# Altium PCB DRV8462.PcbDoc
Units mil, origin at the board's own origin, x right, y up, seen from the top; angles counter-clockwise.
Board outline 2020 x 1320 mil, 2 copper layers (Top Layer, Bottom Layer); 19 components, 21 nets, 87 pads, 96 vias.
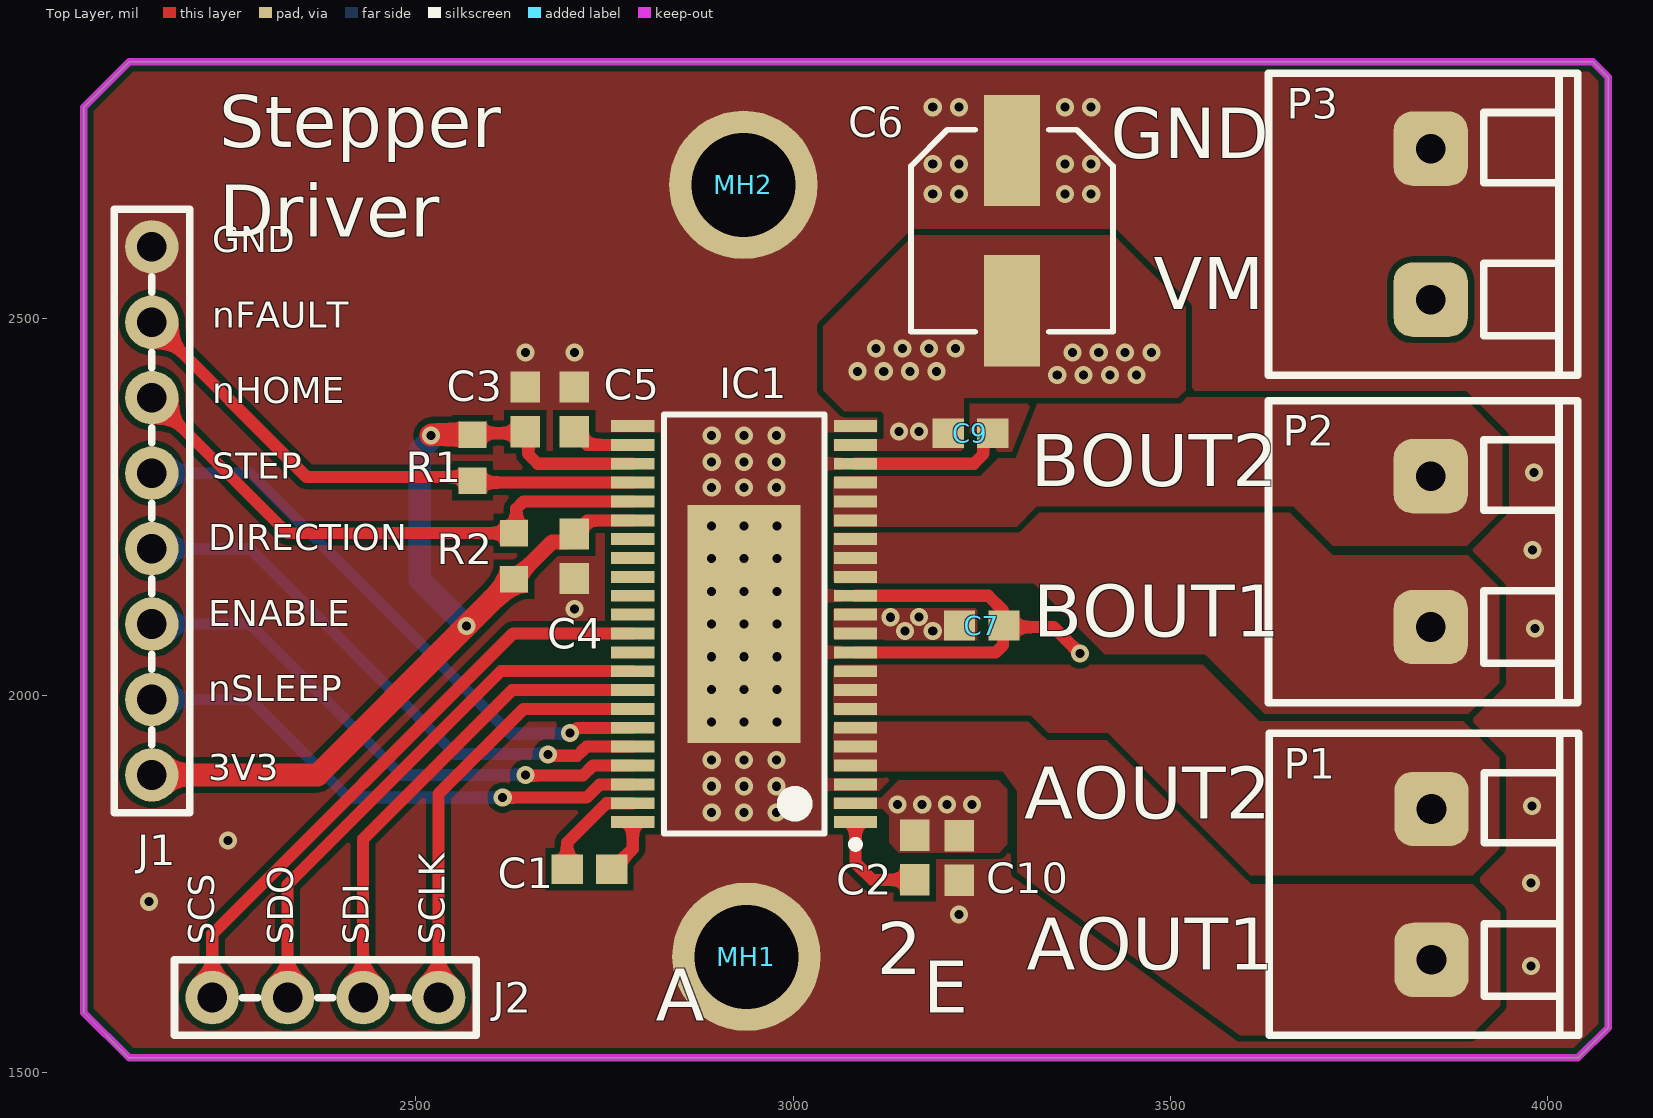
[diagram p0: Top Layer view]
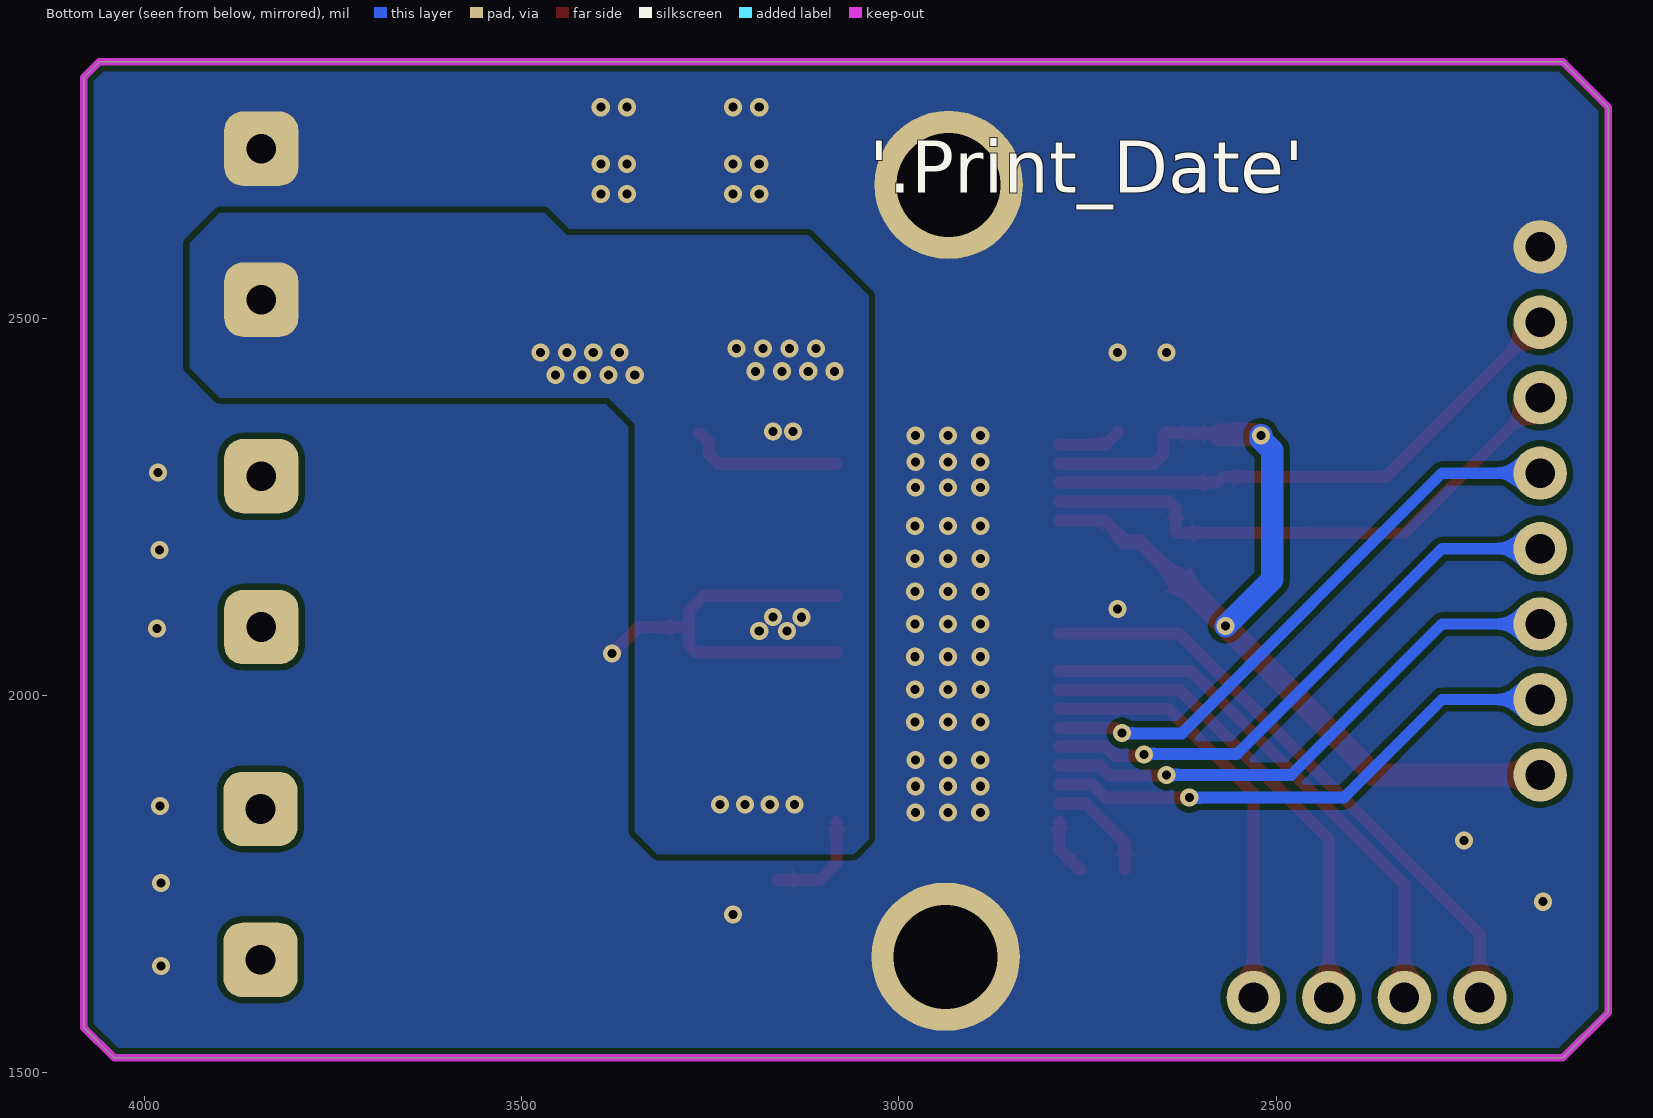
[diagram p1: Bottom Layer view, seen from below]
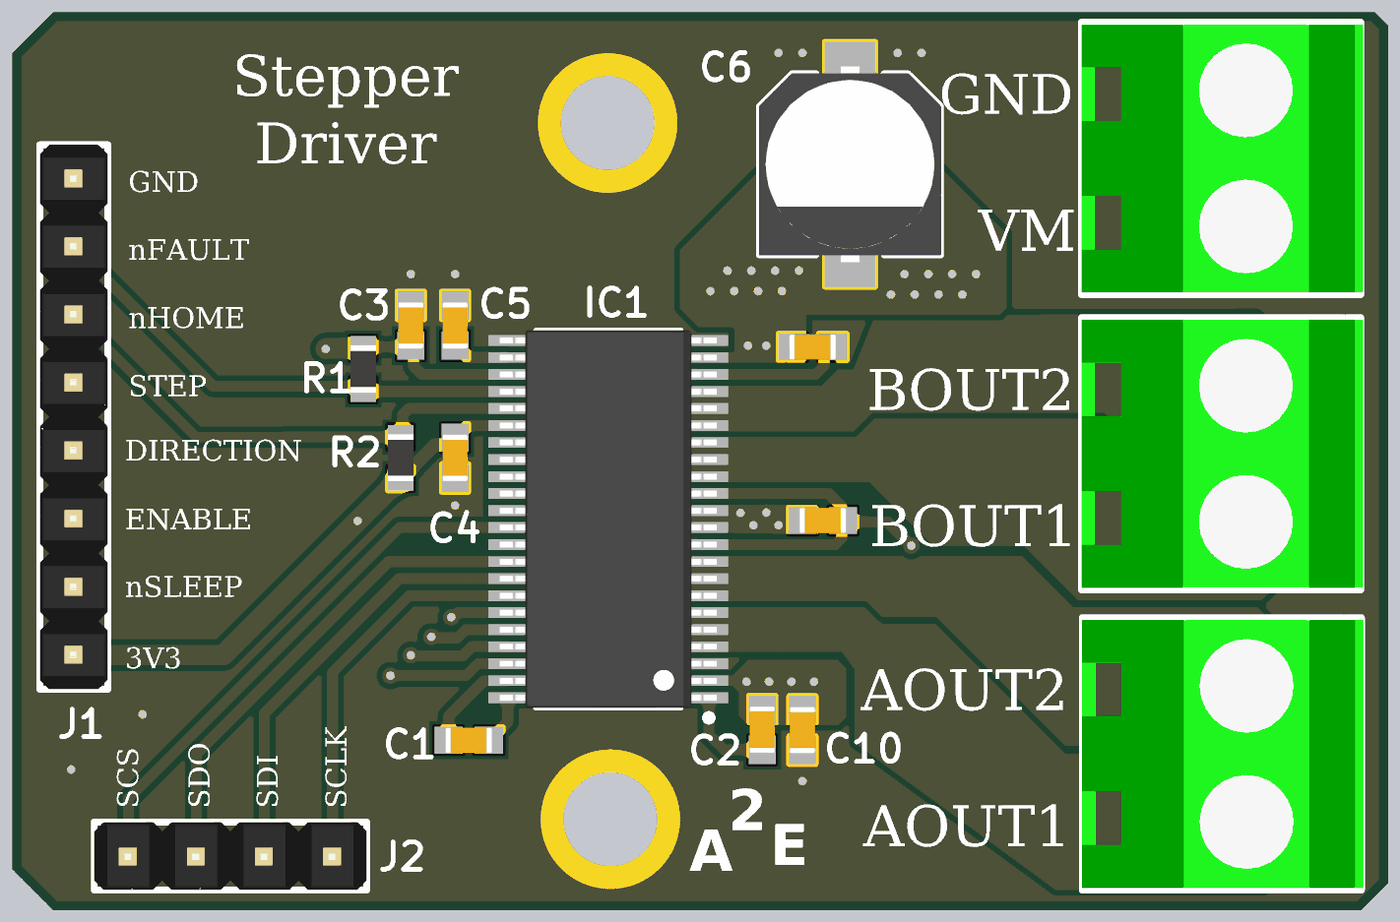
[diagram p2: 3D render of the assembled board from above, using the file's embedded part models]

## Layer stack, top to bottom
Top Solder: solder mask 0.4, Solder Resist, Dk 3.5
Top Layer: signal copper 1.4
Dielectric 1: dielectric 12.6, FR-4, Dk 4.8
Bottom Layer: signal copper 1.4
Bottom Solder: solder mask 0.4, Solder Resist, Dk 3.5

## Board outline
2060,1580 2120,1520 4040,1520 4080,1560 4080,2820 4060,2840 2120,2840 2060,2780

## Design rules (kind name [scope] priority, off if disabled: settings)
Clearance [All] p1: gap=8 ignorepadtopadclearanceinfootprint=FALSE
PlaneConnect [InNet('GND')] p1: planeconnectstyle=Direct reliefexpansion=20 reliefentries=4 reliefconductorwidth=10 reliefairgap=10
PolygonConnect PolygonConnect_1 [InNetClass('All Nets')] p1: connectstyle=Direct reliefconductorwidth=10 reliefentries=4 polygonreliefangle="90 Angle" airgapwidth=10
PolygonConnect [All] p2: connectstyle=Relief reliefconductorwidth=10 reliefentries=4 polygonreliefangle="90 Angle" airgapwidth=10
RoutingVias RoutingVias_1 [InNet('GND')] p1: holewidth=7.87 width=19.68 viastyle="Through Hole" minholewidth=7.87 minwidth=19.68 maxholewidth=29.53 maxwidth=59.06
RoutingVias [All] p2: holewidth=12 width=24 viastyle="Through Hole" minholewidth=5 minwidth=18 maxholewidth=12 maxwidth=24
SolderMaskExpansion [All] p1: expansion=4 istentingtop=FALSE
Width Width_1 [InNet('VM')] p1: maxlimit=30 minlimit=15 preferedwidth=16
Width [InNetClass('Signals')] p2: maxlimit=30 minlimit=15 preferedwidth=16
29 further rules are at their usual default settings.

## Classes and differential pairs
component class clas1: C6 IC1 J1 P3
net class Signals: \F\A\U\L\T\ \H\O\M\E\ \S\C\S\ \S\L\E\E\P\ CPH CPL DIR DVDD ENABLE GND SCLK SDI SDO STEP VCC-3V3 VCP
net class HIGH_current: AOUT1 AOUT2 BOUT1 BOUT2 VM

## Components (designator, comment, footprint, x,y, rotation, side; value= is the part's Value field where it differs from the comment)
C1 "0.1uf" CAP_0603 2730,1770 r0 top
C2 "1uf" CAP_0603 3161,1785.53 r90 top
C3 "1uf" CAP_0603 2645,2379.53 r90 top
C4 "0.1uf" CAP_0603 2710,2185 r90 top
C5 "1uf" CAP_0603 2710,2379.53 r270 top
C6 "100uf" CAPAE7366X60M 3290,2616.3 r270 top
C7 "10000pf" CAP_0603 3250,2093 r180 top
C9 "10000pf" CAP_0603 3235,2348 r180 top
C10 "10000pf" CAP_0603 3220,1785 r90 top
IC1 "DRV8462 Bipolar stepper driver" TSOP64P810X120_HS-45N 2935,2095 r180 top
J1 "Header 8 PIN" HEADER_8PIN 2150,1895 r90 top
J2 "Header 4 PIN" HEADER_4PIN 2530,1600 r180 top
MH1 "Mounting Hole" HOLE-3mm 2938,1654 r0 top
MH2 "Mounting Hole" HOLE-3mm 2934,2677 r0 top
P1 "Terminal Block" "TERM_BLOCK 5mm 2PIN" 3846,1650 r90 top
P2 "Terminal Block" "TERM_BLOCK 5mm 2PIN" 3845,2091 r90 top
P3 "Terminal Block" "TERM_BLOCK 5mm 2PIN" 3845,2525 r90 top
R1 "10Kohm" RES_0603 2575,2315.51 r90 top
R2 "10Kohm" RES_0603 2630,2185 r270 top

## Footprints (in the part's own frame and the unit in brackets; to place one, negate y for a bottom-side part, rotate by r counter-clockwise, add the part's x,y. Pads: shape width x height; smd on the part's side, far side on the other; paste and mask are expansions set on the pad)
CAP_0603 [mm] "Chip Capacitor, 2-Leads, Body 1.60x0.80mm, IPC Medium Density"
  rect 1.05x1 smd: 1(-0.75,0) 2(0.75,0)
  body extent -0.87,-0.48 0.87,0.48, height 0.8
CAPAE7366X60M [mm] "Aluminum Electrolytic Capacitor, Body 6.60x6.60x6.00mm, IPC Low Density"
  rect 3.75x1.9 smd: 1(-2.7,0) 2(2.7,0)
  silkscreen extent -3.4,-3.4 3.4,3.4, body extent -3.65,-3.4 3.65,3.4, height 6
HEADER_4PIN [mm]
  round 1.8 hole 1: 1(0,0) 2(2.54,0) 3(5.08,0) 4(7.62,0)
  silkscreen extent -1.27,-1.27 8.89,1.27, body extent -1.27,-1.27 8.89,1.27, height 9.2
HEADER_8PIN [mm]
  round 1.8 hole 1: 1(0,0) 2(2.54,0) 3(5.08,0) 4(7.62,0) 5(10.16,0) 6(12.7,0) 7(15.24,0) 8(17.78,0)
  silkscreen extent -1.27,-1.27 19.05,1.27, body extent -1.27,-1.27 19.05,1.27, height 9.2
HOLE-3mm [mm]
  round 5 hole 3.5: 1(0,0)
RES_0603 [mm] "Chip Resistor, 2-Leads, Body 1.60x0.80mm, IPC Medium Density"
  rect 0.9x0.95 smd: 1(-0.775,0) 2(0.775,0)
  body extent -0.87,-0.48 0.87,0.48, height 0.8
"TERM_BLOCK 5mm 2PIN" [mm]
  rrect50% 2.5x2.5 hole 1: 1(0,0) 2(5.08,0)
  silkscreen extent -2.54,-4.95 7.62,5.46, body extent -2.46,-5.04 7.54,5.46, height 14
TSOP64P810X120_HS-45N [mm] "TSOP, 44-Leads, Body 14.00x6.10mm, Pitch 0.64mm, Thermal Pad 8.00x3.80mm, IPC Medium Density"
  rect 1.45x0.4 smd mask-0.025: 1(-3.75,6.667) 2(-3.75,6.032) 3(-3.75,5.397) 4(-3.75,4.762) 5(-3.75,4.127) 6(-3.75,3.492) 7(-3.75,2.857) 8(-3.75,2.222) 9(-3.75,1.587) 10(-3.75,0.952) 11(-3.75,0.317) 12(-3.75,-0.318) 13(-3.75,-0.953) 14(-3.75,-1.588) 15(-3.75,-2.223) 16(-3.75,-2.858) 17(-3.75,-3.493) 18(-3.75,-4.128) 19(-3.75,-4.763) 20(-3.75,-5.398) 21(-3.75,-6.033) 22(-3.75,-6.667) 23(3.75,-6.667) 24(3.75,-6.032) 25(3.75,-5.397) 26(3.75,-4.762) 27(3.75,-4.127) 28(3.75,-3.492) 29(3.75,-2.857) 30(3.75,-2.222) 31(3.75,-1.587) 32(3.75,-0.952) 33(3.75,-0.317) 34(3.75,0.318) 35(3.75,0.953) 36(3.75,1.588) 37(3.75,2.223) 38(3.75,2.858) 39(3.75,3.493) 40(3.75,4.128) 41(3.75,4.763) 42(3.75,5.398) 43(3.75,6.033) 44(3.75,6.667)
  rect 3.8x8 smd mask-0.025: 45(0,0)
  silkscreen extent -3.88,-7.05 2.7,7.54, body extent -4.05,-7.05 4.05,7.05, height 1.2

## Part data
C1 C4: library part 0000012, "CAP CER 0.1uF 10V X7R 0603", Digikey part number=732-7939-2-ND, capaticanse=0.1uf, ComponentLink1Description=digikey, ComponentLink1URL=https://www.digikey.com/en/products/detail/w%C3%BCrth-elektronik/885012206020/5453794
C2 C5: library part 0000009, "CAP CER 1uF 0603 16V X7R", Digikey part number=1276-1019-2-ND, capaticanse=1uf, ComponentLink1Description=digikey, ComponentLink1URL=https://www.digikey.com/en/products/detail/samsung-electro-mechanics/CL10B105KO8NNNC/3886677
C3: library part 0000011, "CAP CER 1uF 10V X7R 0603", Digikey part number=1276-1946-2-ND, capaticanse=1uf, ComponentLink1Description=digikey, ComponentLink1URL=https://www.digikey.com/en/products/detail/samsung-electro-mechanics/CL10B105KP8NNNC/3887604
C6: library part 0000013, "CAP ALUM POLY 100UF 20% 63V SMD", Digikey part number=399-15648-2-ND, capaticanse=100uf, ComponentLink1Description=digikey, ComponentLink1URL=https://www.digikey.com/en/products/detail/kemet/A767MU107M1JLAE028/7392906
C7 C9 C10: library part 0000010, "CAP CER 10000PF 63V X7R 0603", Digikey part number=1608-1294-2-ND, capaticanse=10000pf, ComponentLink1Description=digikey, ComponentLink1URL=https://www.digikey.com/en/products/detail/knowles-syfer/060330630103KXT/6565244
IC1: library part DRV8462, "65-V, 10-A, DUAL H-BRIDGE STEPPER DRIVER", Digikey part number=296-DRV8462DDWRTR-ND, Mouser part number=595-DRV8462DDWR, ComponentLink1Description=DigiKey, ComponentLink1URL=https://www.digikey.com/en/products/detail/texas-instruments/DRV8462DDWR/17395001?s=N4IgTCBcDaICYCcBuAOALANggXQL5A, ComponentLink2Description=Mouser, ComponentLink2URL=https://eu.mouser.com/ProductDetail/Texas-Instruments/DRV8462DDWR?qs=rQFj71Wb1eVexvYNsDfnvA%3D%3D, ComponentLink3Description=datasheet, ComponentLink3URL=https://www.ti.com/lit/ds/symlink/drv8462.pdf
J1: library part 00000005
J2: library part 00000004
MH1 MH2: library part 00000006, "Mounting Hole 3mm"
P1 P2 P3: library part 00000001, "Terminal block 90 deg 5mm 2PIN", Digikey part number=2057-EB20-02-C-ND, ComponentLink1Description=DigiKey, ComponentLink1URL=https://www.digikey.com/en/products/detail/adam-tech/EB20-02-C/9831508
R1 R2: library part R000001, "RES 10K OHM 1% 1/10W 0603", ComponentLink1Description=digikey, ComponentLink1URL=https://www.digikey.com/en/products/detail/vishay-beyschlag-draloric-bc-components/MCT06030C1002FP500/1850440, resistance=10Kohm

## Via types
v1: diameter 24, hole 12, Top Layer to Bottom Layer, 96 vias

## Nets (pads, with @x,y where several pads share a name; then routed paths per layer and width w, separated by ;. In a path a pad name is that pad's centre, name@x,y a point inside that pad or via, vN(x,y) a via of type N, cw(c..) or ccw(c..) an arc to the next point about the centre after c; other vN are vias at no path point)
\F\A\U\L\T\: IC1.26 J1.7 R1.1 | length 725.4
  Top Layer w16: J1.7 2355,2290 2570,2290 R1.1 2577.37,2282.63 2787.24,2282.63 IC1.26
\H\O\M\E\: IC1.27 J1.6 R2.1 | length 746.4
  Top Layer w15: J1.6 2329.49,2215.51 2459.49,2215.51
  Top Layer w16: 2459.49,2215.51 R2.1 2633,2218.51 2633,2248 2642.5,2257.5 IC1.27
\S\C\S\: IC1.34 J2.4 | length 806.4
  Top Layer w16: J2.4 2230,1683.94 2628.56,2082.5 IC1.34
\S\L\E\E\P\: IC1.42 J1.2 | length 698.5
  Top Layer w16: v1(2615,1865) 2726.06,1865 2743.43,1882.37 2787.24,1882.37 IC1.42
  Bottom Layer w15: J1.2 2280,1995 2410,1865
  Bottom Layer w16: 2410,1865 v1(2615,1865)
AOUT1: IC1.4 IC1.5 IC1.6 P1.1
AOUT2: IC1.7 IC1.8 IC1.9 P1.2
BOUT1: IC1.14 IC1.15 IC1.16 P2.1
BOUT2: IC1.17 IC1.18 IC1.19 P2.2
CPH: C1.2 IC1.44 | length 74.6
  Top Layer w16: C1.2 2760.51,1770 2787.36,1796.85 IC1.44
CPL: C1.1 IC1.43 | length 143.9
  Top Layer w16: C1.1 2700.47,1805.47 2752.5,1857.5 IC1.43
DIR: IC1.40 J1.4 | length 756.1
  Top Layer w16: v1(2675,1922) 2676.53,1920.47 2713.65,1920.47 2722.68,1929.5 2722.78,1929.5 2725.78,1932.5 IC1.40
  Bottom Layer w15: J1.4 2280,2195 2552,1923
  Bottom Layer w16: 2552,1923 2674,1923 v1(2675,1922)
DVDD: C5.2 IC1.24 | length 85.2
  Top Layer w16: C5.2 2710,2349.02 2726.52,2332.5 IC1.24
ENABLE: IC1.41 J1.3 | length 726.2
  Top Layer w16: v1(2645,1895) 2646,1894 2721.12,1894 2734.62,1907.5 IC1.41
  Bottom Layer w15: J1.3 2280,2095 2480,1895
  Bottom Layer w16: 2480,1895 v1(2645,1895)
GND: C3.2 C4.1 C5.1 C6.1 C7.1 C9.1 C10.1 IC1.3 IC1.10 IC1.13 IC1.20 IC1.22 IC1.23 IC1.45 J1.8 MH1.1 MH2.1 P3.2 | length 774.3
  Top Layer w16: IC1.10 3175.38,2057.5 3175.57,2057.31 3268.31,2057.31 3278,2067 3278,2091.47 C7.1 ; IC1.13 3258.5,2132.5 3278,2113 3278,2094.53 C7.1 ; IC1.20 3239.5,2307.5 3251.86,2319.86 3251.86,2336.31 3263.54,2348 C9.1 ; v1(3380,2056) 3345,2091 3281.53,2091 C7.1
  other v1: 3978,1642 3220,1710 2146,1727 3978,1752 2251,1808 2892,1845 2935,1845 2978,1845 3979,1854 2892,1880 2935,1880 2978,1880 2892,1915 2935,1915 2978,1915 2891.69,1965.08 2935,1965.08 2978.31,1965.08 2891.69,2008.39 2935,2008.39 2978.31,2008.39 2891.69,2051.69 2935,2051.69 2978.31,2051.69 3983,2089 2891.69,2095 2935,2095 2978.31,2095 2710,2115 2891.69,2138.31 2935,2138.31 2978.31,2138.31 2891.69,2181.61 2935,2181.61 2978.31,2181.61 3980,2193 2891.69,2224.92 2935,2224.92 2978.31,2224.92 2892,2276 2935,2276 2978,2276 3982,2296 2892,2310 2935,2310 2978,2310 2892,2345 2935,2345 2978,2345 2645,2455 2710,2455 3185,2665 3220,2665 3360,2665 3395,2665 3185,2705 3220,2705 3360,2705 3395,2705 3185,2780 3220,2780 3360,2780 3395,2780
SCLK: IC1.38 J2.1 | length 574
  Top Layer w16: J2.1 2530,1870 2642.5,1982.5 IC1.38
SDI: IC1.37 J2.2 | length 649.2
  Top Layer w16: J2.2 2430,1810 2627.5,2007.5 IC1.37
SDO: IC1.36 J2.3 | length 724.4
  Top Layer w16: J2.3 2330,1750 2612.5,2032.5 IC1.36
STEP: IC1.39 J1.5 | length 783.4
  Top Layer w16: v1(2704.39,1950.71) 2706.56,1950.71 2713.35,1957.5 IC1.39
  Bottom Layer w15: J1.5 2280,2295 2625,1950
  Bottom Layer w16: 2625,1950 2703.69,1950 v1(2704.39,1950.71)
VCC-3V3: C3.1 C4.2 IC1.25 IC1.28 J1.1 R1.2 R2.2 | length 1365.1
  Top Layer w16: R1.2 2576.99,2348.01 2643.01,2348.01 C3.1 2649,2346 2649,2320 2661.5,2307.5 IC1.25 ; C4.2 2710,2215.51 2726.99,2232.5 IC1.28
  Top Layer w20: R2.2 2630.98,2154.49 2680.35,2203.86 2700.31,2203.86 2710,2213.54 C4.2
  Top Layer w30: J1.1 2369.53,1895 v1(2566.77,2092.24) 2629.02,2154.49 R2.2 ; v1(2520,2345) 2521.02,2346.02 R1.2
  Bottom Layer w30: v1(2520,2345) 2520,2340 2505,2325 2505,2154.02 v1(2566.77,2092.24)
VCP: C2.1 IC1.1 | length 141.8
  Top Layer w16: IC1.1 3082.64,1778.36 3105,1756 C2.1
VM: C2.2 C6.2 C7.2 C9.2 C10.2 IC1.2 IC1.11 IC1.12 IC1.21 P3.1
  other v1: 3138,1856 3171,1856 3204,1856 3237,1856 3148,2086 3185,2086 3129,2104 3167,2104.5 3140,2350 3167,2350 3350,2425 3385,2425 3420,2425 3455,2425 3085,2430 3120,2430 3155,2430 3190,2430 3370,2455 3405,2455 3440,2455 3475,2455 3110,2460 3145,2460 3180,2460 3215,2460
pads on no net: IC1.29 IC1.30 IC1.31 IC1.32 IC1.33 IC1.35

## Polygon pours and split planes (outlines as drawn)
GND on Top Layer "TOP-GND" (solid, remove dead copper, pour order 18): 2060,1580 2120,1520 4040,1520 4080,1560 4080,2820 4060,2840 2120,2840 2060,2780
AOUT1 on Top Layer "AOUT1_L01_P017" (solid, pour order 17): 3278,1900 3053,1900 3053,1965 3054,1966 3312,1966 3337,1941 3416,1941 3607,1750 3901,1750 3937,1714 3937,1589 3898,1550 3757,1550 3592,1550 3297,1766 3297,1873.4
AOUT2 on Top Layer "AOUT2_L01_P016" (solid, pour order 16): 3053,2039 3055,2041 3393,2041 3543,2041 3618,1966 3888,1966 3936,1918 3936,1797 3901,1762 3606,1762 3417,1951 3338,1951 3315,1974 3055,1974 3053,1976
BOUT1 on Top Layer "BOUT1_L01_P014" (solid, pour order 14): 3053,2149 3053,2216 3054,2217 3300,2217 3327,2244 3657,2244 3715,2186 3894,2186 3936,2144 3936,2017 3895,1976 3625,1976 3546,2055 3413,2055 3319,2149 3116,2149
VM on Top Layer "VM_L01_P015" (solid, pour order 15): 3053,2114 3055,2116 3241,2116 3244,2113 3244,2072 3123,2072 3120,2075 3055,2075 3053,2077
BOUT2 on Top Layer "BOUT2_L01_P011" (solid, pour order 11): 3053,2288 3056,2291 3248,2291 3272,2315 3295,2315 3327,2395 3887.98,2396.02 3940,2344 3940,2246 3893,2199 3715,2199 3663,2251 3323,2251 3296,2224 3053,2224 3053,2287
VM on Top Layer "VM_L01_P009" (solid, pour order 9): 3054,2339 3055,2340 3118,2340 3120,2342 3120,2373 3116,2377 3068,2377 3040,2405 3217,2405 3226,2396 3226,2328 3223,2325 3054,2325
VM on Top Layer "VM_L01_P008" (solid, pour order 8): 3053,1865 3117,1865 3140,1888 3272,1888 3284,1876 3284,1803 3273,1792 3140,1792 3127,1805 3127,1841 3118,1850 3053,1850
VM on Top Layer "VM_L01_P007" (solid, pour order 7): 3050,2395 3040,2405 3040,2490 3160,2610 3425,2610 3520,2515 3520,2405 3510,2395
GND on Bottom Layer "BOT-GND" (solid, pour order 19): 2060,1580 2120,1520 4040,1520 4080,1560 4080,2820 4060,2840 2120,2840 2060,2780
VM on Bottom Layer "VM_L02_P006" (solid, pour order 6): 3900,2395 3940,2435 3940,2600 3900,2640 3470,2640 3440,2610 3120,2610 3040,2530 3040,1810 3060,1790 3320,1790 3350,1820 3350,2360 3370,2380 3385,2395

## Keep-outs
Keep-Out Layer:
  the board outline again, w10

## Silkscreen, mask and mechanical layers (free items; w line width, h text height)
Top Overlay:
  text "GND" at 3420.59,2690.7 h114.17
  text "Stepper / Driver" at 2239.08,2586 h118.11
  text "GND" at 2230,2575.78 h60
  text "VM" at 3477.82,2489.42 h118.11
  text "nFAULT" at 2230,2475.78 h60
  text "nHOME" at 2230,2375.78 h60
  text "STEP" at 2230,2275.67 h60
  text "BOUT2" at 3314.74,2255.42 h118.11
  text "DIRECTION" at 2225,2180.78 h60
  text "ENABLE" at 2225,2080 h60
  text "BOUT1" at 3318.46,2055.42 h118.11
  text "nSLEEP" at 2225,1980.67 h60
  text "3V3" at 2225,1875.78 h60
  text "AOUT2" at 3306,1814.42 h118.11
  text "SCS" at 2244.33,1670 h60 r90
  text "SDO" at 2349.22,1670 h60 r90
  text "SDI" at 2449.33,1670 h60 r90
  text "SCLK" at 2550.33,1670 h60 r90
  text "AOUT1" at 3309.72,1614.42 h118.11
  text "2" at 3110.71,1608.55 h118.11
  text "E" at 3172.46,1557.24 h118.11
  text "A" at 2817.78,1546.46 h118.11
Bottom Overlay:
  text "'.Print_Date'" at 3039.13,2644 h118.11